# Altium PCB PCB2.pcbdoc
Units mil, origin at the board's own origin, x right, y up, seen from the top; angles counter-clockwise.
Board outline 3020 x 2095 mil, 2 copper layers (Top Layer, Bottom Layer); 19 components, 13 nets, 79 pads, 108 vias.
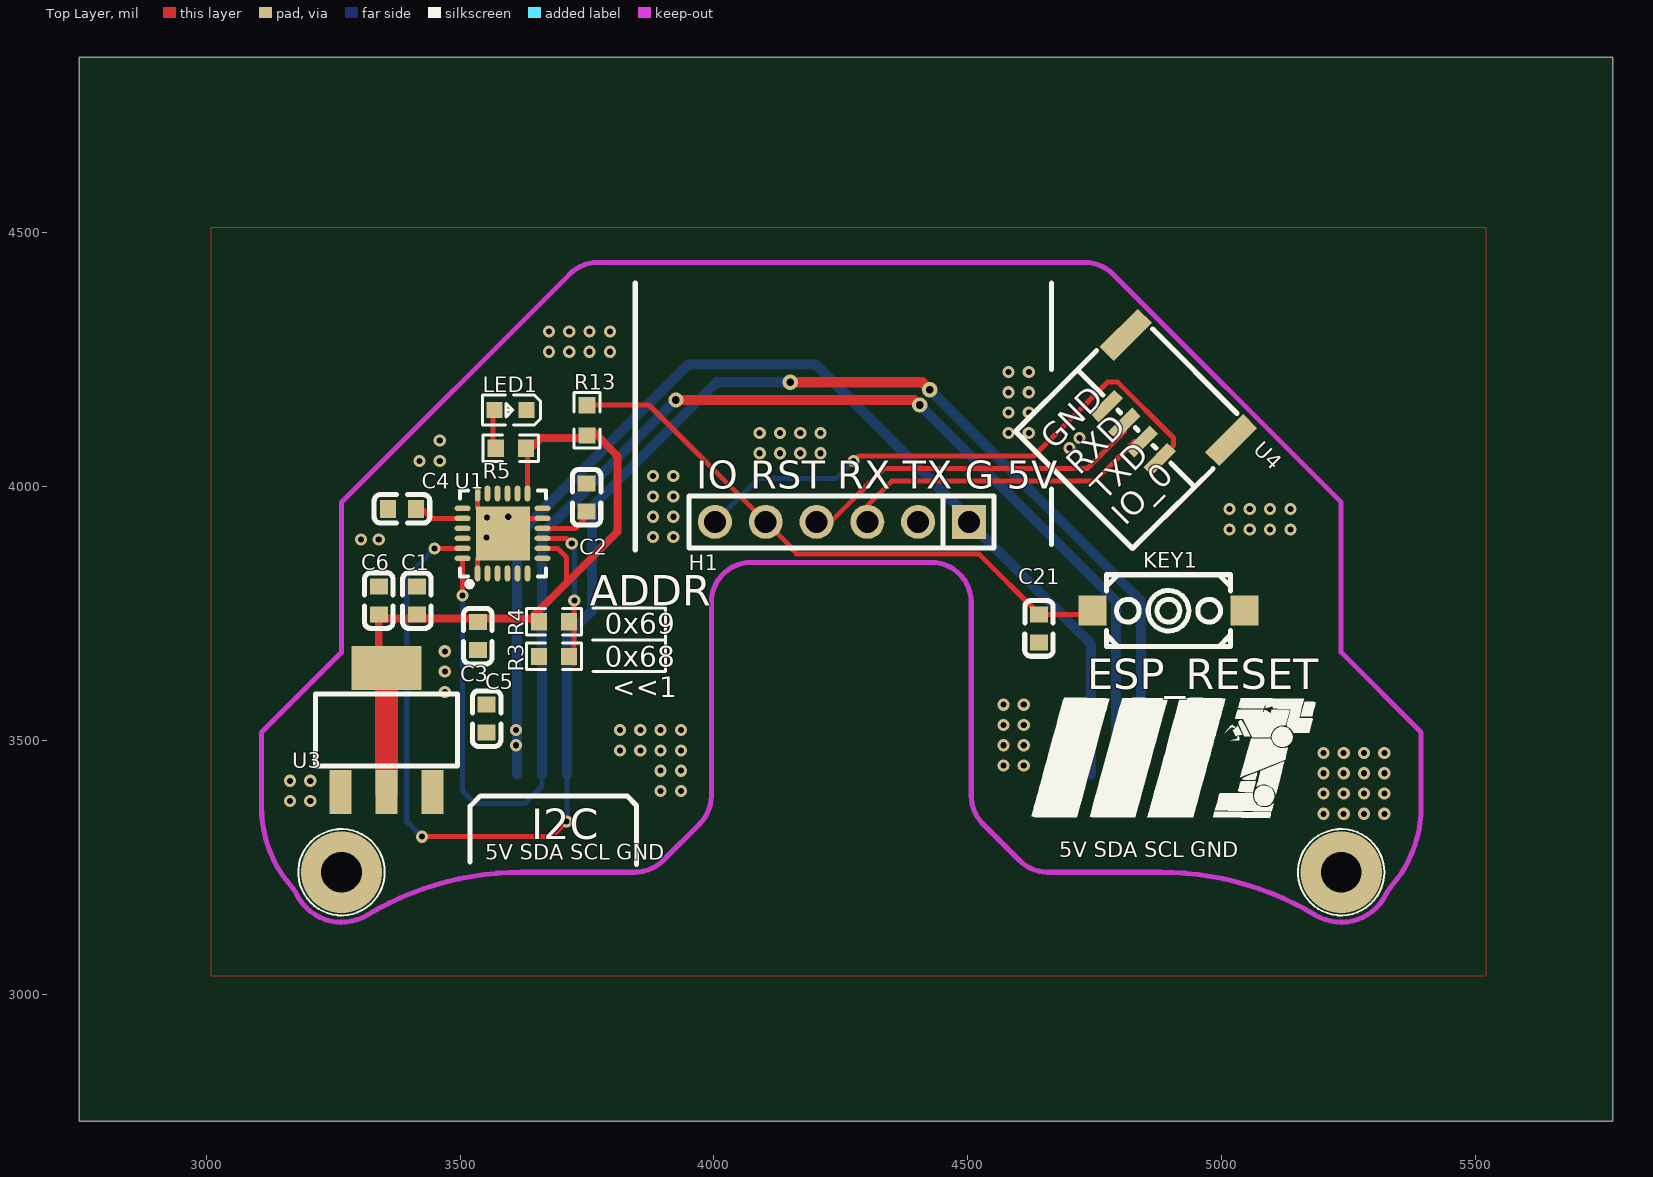
[diagram p0: Top Layer view]
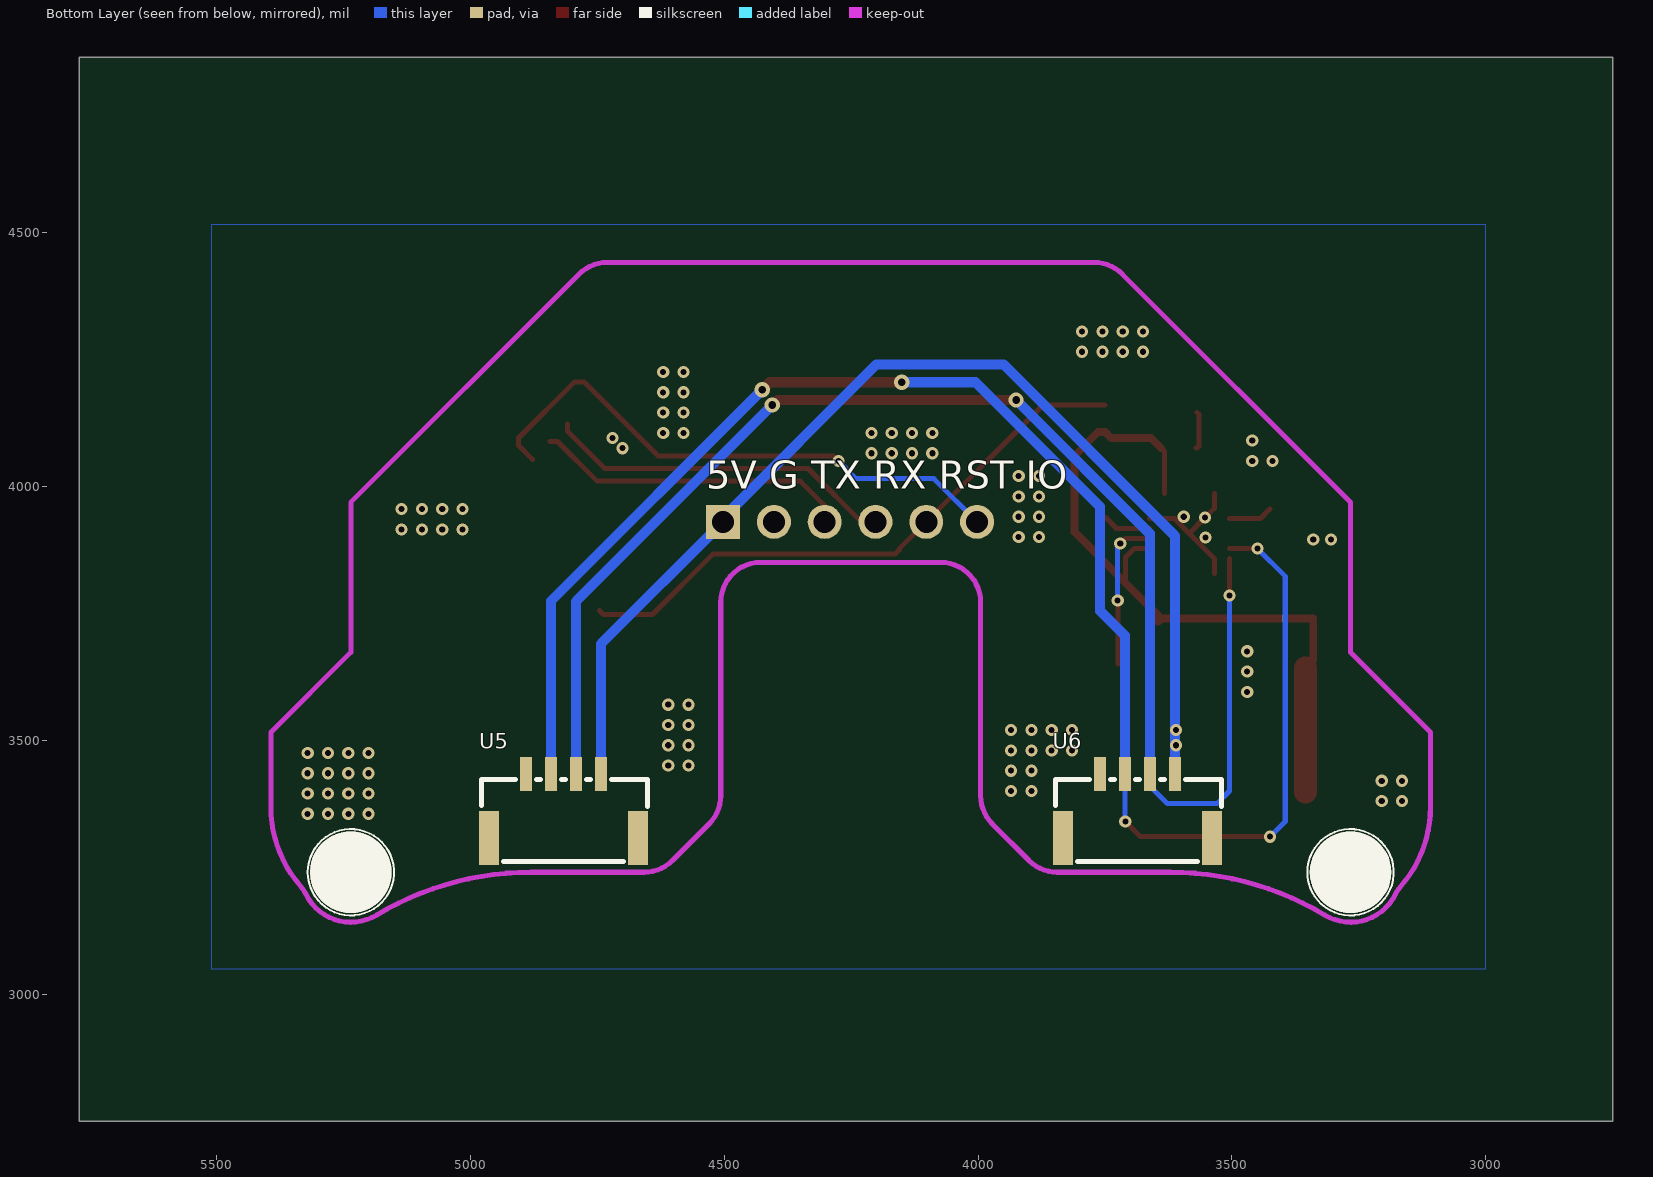
[diagram p1: Bottom Layer view, seen from below]

## Layer stack, top to bottom
Top Layer: signal copper (thickness not stored)
Dielectric: dielectric 12.6, FR-4, Dk 4.8
Bottom Layer: signal copper (thickness not stored)

## Board outline
5770,2750 2750,2750 2750,4845 5770,4845

## Design rules (kind name [scope] priority, off if disabled: settings)
BoardOutlineClearance copperThickness1oz [All] p0: genericclearance=10 ignorepadtopadclearanceinfootprint=FALSE except(0: Arc-SplitContinuation Track-SplitContinuation SMDPad-SplitContinuation THPad-SplitContinuation Via-SplitContinuation Fill-SplitContinuation Poly-SplitContinuation Region-SplitContinuation Text-SplitContinuation; 6: Track-CutoutEdge SMDPad-CutoutEdge THPad-CutoutEdge Via-CutoutEdge Region-CutoutEdge; 11.8: Track-OutlineEdge SMDPad-OutlineEdge THPad-OutlineEdge Via-OutlineEdge Fill-OutlineEdge Region-OutlineEdge Poly-OutlineEdge Text-OutlineEdge Fill-CutoutEdge)
BoardOutlineClearance copperThickness2oz [All] p0: genericclearance=10 ignorepadtopadclearanceinfootprint=FALSE except(0: Arc-SplitContinuation Track-SplitContinuation SMDPad-SplitContinuation THPad-SplitContinuation Via-SplitContinuation Fill-SplitContinuation Poly-SplitContinuation Region-SplitContinuation Text-SplitContinuation; 6: Track-CutoutEdge SMDPad-CutoutEdge THPad-CutoutEdge Via-CutoutEdge Region-CutoutEdge; 11.8: Track-OutlineEdge SMDPad-OutlineEdge THPad-OutlineEdge Via-OutlineEdge Fill-OutlineEdge Region-OutlineEdge Poly-OutlineEdge Text-OutlineEdge Fill-CutoutEdge)
Clearance copperThickness1oz [(InNet('GND') OR InNet('VCC-3.3V') OR InNet('$1N1296') OR InNet('$1N969') OR InNet('RST') OR InNet('SCL') OR InNet('SDA') OR InNet('VCC-5.0V') OR InNet('RXD') OR InNet('TXD') OR InNet('IO_0') OR InNet('$1N2648') OR InNet('AD0'))] p1: gap=7 ignorepadtopadclearanceinfootprint=FALSE except(4: Track-Track; 6: Track-SMDPad SMDPad-SMDPad Track-THPad SMDPad-THPad THPad-THPad Track-Via SMDPad-Via THPad-Via Via-Via SMDPad-Fill THPad-Fill Via-Fill Fill-Fill Track-Region SMDPad-Region THPad-Region Via-Region Region-Region Track-Poly SMDPad-Poly THPad-Poly Via-Poly Fill-Poly Region-Poly Poly-Poly Track-Text SMDPad-Text THPad-Text Via-Text Fill-Text Region-Text Poly-Text Text-Text; 6.9: Track-Hole SMDPad-Hole THPad-Hole Via-Hole Fill-Hole Region-Hole Poly-Hole Text-Hole Sheet-Hole; 11.8: Track-Fill Fill-Region Track-Sheet SMDPad-Sheet THPad-Sheet Via-Sheet Fill-Sheet Region-Sheet Poly-Sheet Text-Sheet)
Clearance copperThickness2oz [All] p1: gap=7 ignorepadtopadclearanceinfootprint=FALSE except(6: Track-SMDPad SMDPad-SMDPad Track-THPad SMDPad-THPad THPad-THPad Track-Via SMDPad-Via THPad-Via Via-Via SMDPad-Fill THPad-Fill Via-Fill Fill-Fill Track-Region SMDPad-Region THPad-Region Via-Region Region-Region Track-Poly SMDPad-Poly THPad-Poly Via-Poly Fill-Poly Region-Poly Poly-Poly Track-Text SMDPad-Text THPad-Text Via-Text Fill-Text Region-Text Poly-Text Text-Text; 6.9: Track-Hole SMDPad-Hole THPad-Hole Via-Hole Fill-Hole Region-Hole Poly-Hole Text-Hole Sheet-Hole; 8: Track-Track; 11.8: Track-Fill Fill-Region Track-Sheet SMDPad-Sheet THPad-Sheet Via-Sheet Fill-Sheet Region-Sheet Poly-Sheet Text-Sheet)
DiffPairsRouting differentialPair [All] p1: maxuncoupledlength=10 minlimit=6 maxlimit=6 mostfreqgap=6 toplayer_minwidth=5 toplayer_prefwidth=10 toplayer_maxwidth=100 bottomlayer_minwidth=5 bottomlayer_prefwidth=10 bottomlayer_maxwidth=100
PasteMaskExpansion pasteMaskExpansion [All] p1: expansion=0
PlaneConnect innerPlane [All] p1: planeconnectstyle=Relief reliefexpansion=20 reliefentries=4 reliefconductorwidth=10 reliefairgap=10
PolygonConnect copperRegion [All] p1: connectstyle=Direct reliefentries=4 reliefconductorwidth=10 polygonreliefangle="90 Angle" airgapwidth=10
RoutingVias viaSize [All] p1: viastyle="Through Hole" holewidth=12 minholewidth=11.8 maxholewidth=248 width=24 minwidth=19.7 maxwidth=393.7
SolderMaskExpansion solderMaskExpansion [All] p1: useseparateexpansions=TRUE expansion=2 expansionbottom=2
Width copperThickness1oz [All] p1: maxlimit=100 minlimit=5 preferedwidth=10
Width copperThickness2oz [All] p1: maxlimit=100 minlimit=8 preferedwidth=10

## Components (designator, comment, footprint, x,y, rotation, side; value= is the part's Value field where it differs from the comment)
C1 "CGA0603X7R104K500JT" C0603 3415,3775 r90 top
C2 "CGA0603X7R104K500JT" C0603 3749.21,3978.22 r90 top
C3 "CC0603KRX7R9BB103" C0603 3535,3705 r90 top
C4 "CC0603KRX7R9BB222" C0603 3385.63,3955.63 r180 top
C5 "CGA0603X5R106K100JT" C0603 3552.44,3542.56 r270 top
C6 "CGA0603X5R106K100JT" C0603 3340,3775 r270 top
C21 "CGA0603X5R106K100JT" C0603 4640,3720 r270 top
H1 "PZ254V-11-06P" HDR-TH_6P-P2.54-V-M 4251.97,3930 r180 top
KEY1 "K2-3.6×6.1_SMD" KEY-SMD_2P-L6.2-W3.6-LS8.0 4895,3755 r0 top
LED1 "KT-0603R" LED0603-RD 3599.45,4150.32 r180 top
R3 "0603WAF1002T5E" R0603 3685,3665 r0 top
R4 "0603WAF1002T5E" R0603 3685,3733 r180 top
R5 "0603WAF1001T5E" R0603 3600,4075 r180 top
R13 "0603WAF1002T5E" R0603 3750,4130 r270 top
U1 "MPU-6050" QFN-24_L4.0-W4.0-P0.50-BL-EP2.7 3583.64,3907.21 r0 top
U3 "AMS1117-3.3" SOT-223_L6.7-W3.5-P2.30-BR 3355,3520 r270 top
U4 "GH1.25-4P_C9900006327" CONN-SMD_GH1.25-4P 4870,4150 r135 top
U5 "GH1.25-4P_C9900006327" CONN-SMD_GH1.25-4P 4816.17,3370 r180 bottom
U6 "GH1.25-4P_C9900006327" CONN-SMD_GH1.25-4P 3686.17,3370 r180 bottom

## Footprints (in the part's own frame and the unit in brackets; to place one, negate y for a bottom-side part, rotate by r counter-clockwise, add the part's x,y. Pads: shape width x height; smd on the part's side, far side on the other; paste and mask are expansions set on the pad)
C0603 [mm]
  rect 0.8x0.9 smd: 1(-0.7,0) 2(0.7,0)
  silkscreen extent -1.39,-0.71 1.39,0.71
CONN-SMD_GH1.25-4P [mm]
  rect 0.6x1.7 smd: 1(-1.875,1.6) 2(-0.625,1.6) 3(0.625,1.6) 4(1.875,1.6)
  rect 1x2.7 smd: 5(-3.725,-1.6) 6(3.725,-1.6)
  silkscreen extent -4.1,-2.76 4.2,1.34
HDR-TH_6P-P2.54-V-M [mm]
  rect 1.7x1.7 hole 1.1: 1(-6.35,0)
  round 1.7 hole 1.1: 2(-3.81,0) 3(-1.27,0) 4(1.27,0) 5(3.81,0) 6(6.35,0)
  silkscreen extent -7.6,-1.3 7.65,1.3
KEY-SMD_2P-L6.2-W3.6-LS8.0 [mm]
  rect 1.4x1.5 smd: 1(-3.8,0) 2(3.8,0)
  silkscreen extent -3.1,-1.8 3.1,1.8
LED0603-RD [mm]
  rect 0.8x0.8 smd: 1(-0.799,0) 2(0.799,0)
  silkscreen extent -1.49,-0.75 1.39,0.76
QFN-24_L4.0-W4.0-P0.50-BL-EP2.7 [mm]
  oval 0.28x0.8 smd: 1(-1.25,-2) 2(-0.75,-2) 3(-0.25,-2) 4(0.25,-2) 5(0.75,-2) 6(1.25,-2) 13(1.25,2) 14(0.75,2) 15(0.25,2) 16(-0.25,2) 17(-0.75,2) 18(-1.242,2)
  oval 0.8x0.28 smd: 7(2,-1.25) 8(2,-0.75) 9(2,-0.25) 10(2,0.25) 11(2,0.75) 12(2,1.25) 19(-2,1.25) 20(-2,0.75) 21(-2,0.25) 22(-2,-0.25) 23(-2,-0.75) 24(-2,-1.25)
  rect 2.7x2.7 smd: 25(0.012,0)
  silkscreen extent -2.14,-2.79 2.16,2.15
R0603 [mil]
  rect 31.75x34.02 smd: 1(-29.66,0) 2(29.66,0)
  silkscreen extent -55,-26 55,26
SOT-223_L6.7-W3.5-P2.30-BR [mm]
  rect 2.2x1.1 smd: 1(3.099,-2.3) 2(3.099,0) 3(3.099,2.3)
  rect 2.2x3.5 smd: 4(-3.099,0)
  silkscreen extent -1.8,-3.55 1.8,3.55

## Via types
v1: diameter 24.02, hole 12.01, Top Layer to Bottom Layer, 102 vias
v2: diameter 30, hole 15, Top Layer to Bottom Layer, 4 vias
v3: diameter 160, hole 80, Top Layer to Bottom Layer, 2 vias

## Nets (pads, with @x,y where several pads share a name; then routed paths per layer and width w, separated by ;. In a path a pad name is that pad's centre, name@x,y a point inside that pad or via, vN(x,y) a via of type N, cw(c..) or ccw(c..) an arc to the next point about the centre after c; other vN are vias at no path point)
$1N969: C4.1 U1.20 | length 87.7
  Top Layer w10: C4.1@3425,3955.63 3443.89,3936.74 U1.20
$1N1296: C2.1 U1.10 | length 95.9
  Top Layer w10: U1.10 3727.41,3917.05 C2.1@3749.21,3938.85
$1N2648: LED1.2 R5.2 | length 74.2
  Top Layer w10: LED1.2@3568.53,4144.99 3565,4141.47 3565,4079.37 3569.37,4075 R5.2
AD0: R3.2 R4.1 U1.9 | length 301.5
  Top Layer w10: U1.9 3710,3897.37 v1(3720,3887.37) ; R3.2@3724.37,3650 3724.37,3774.37 v1(3725,3775)
  Bottom Layer w10: v1(3720,3887.37) 3725,3882.37 v1(3725,3775)
GND: C1.2 C2.2 C3.1 C4.2 C5.1 C6.1 C21.2 H1.2 KEY1.2 LED1.1 R3.1 U1.1 U1.11 U1.18 U1.25 U3.1 U4.4 U5.1 U6.1 | length 289
  Top Layer w10: U1.1 3534.43,3857.51 U1.25 ; U1.18 3534.74,3956.6 v1(3553.03,3938.31) U1.25 ; U1.11 3613.66,3936.74 U1.25
  other v1: 5200,3355 5240,3355 5280,3355 5320,3355 3165,3380 3205,3380 5200,3395 5240,3395 5280,3395 5320,3395 3895,3400 3935,3400 3165,3420 3205,3420 5200,3435 5240,3435 5280,3435 5320,3435 3895,3440 3935,3440 4570,3450 4610,3450 5200,3475 5240,3475 5280,3475 5320,3475 3815,3480 3855,3480 3895,3480 3935,3480 4570,3490 4610,3490 3815,3520 3855,3520 3895,3520 3935,3520 4570,3530 4610,3530 4570,3570 4610,3570 3470,3595 3470,3635 3470,3675 3305,3895 3340,3895 3552.18,3899.45 3880,3900 3920,3900 5015,3915 5055,3915 5095,3915 5135,3915 3595,3940 3880,3940 3920,3940 5015,3955 5055,3955 5095,3955 5135,3955 3880,3980 3920,3980 3880,4020 3920,4020 3420,4050 3460,4050 4090,4065 4130,4065 4170,4065 4210,4065 4700,4075 3460,4090 4720,4095 4090,4105 4130,4105 4170,4105 4210,4105 4580,4105 4620,4105 4580,4145 4620,4145 4580,4185 4620,4185 4580,4225 4620,4225 3675,4265 3715,4265 3755,4265 3795,4265 3675,4305 3715,4305 3755,4305 3795,4305
  other v3: 3266.5,3240 5235,3240
IO_0: H1.6 U4.1 | length 1115.6
  Top Layer w10: v1(4275,4050) 4285,4060 4630,4060 4775,4205 4795,4205 4905,4095 4905,4080.6 U4.1
  Bottom Layer w10: H1.6 4086.97,4015 4240,4015 v1(4275,4050)
RST: C21.1 H1.5 KEY1.1 R13.1 | length 1170.7
  Top Layer w10: R13.1 3750.34,4160 3871.97,4160 H1.5 4155,3876.97 4155,3875 4162.97,3867.03 4521.26,3867.03 4640.87,3747.42 4737.82,3747.42 KEY1.1
RXD: H1.4 U4.3 | length 698.9
  Top Layer w10: H1.4 4206.97,3925 4225,3925 4335,4035 4735.2,4035 4808.06,4107.86 U4.3
SCL: U1.23 U5.2 U6.2 | length 3297.8
  Top Layer w10: v1(3425,3310) 3680,3310 v1(3710,3340) ; v1(3450,3877.68) U1.23
  Top Layer w20: v2(4150,4205) 4410,4205 v2(4425,4190)
  Bottom Layer w10: v1(3425,3310) 3395,3340 3395,3822.68 v1(3450,3877.68) ; v1(3710,3340) 3710.77,3340.77 U6.2
  Bottom Layer w20: U6.2 3710.77,3705.77 3760,3755 3760,3960 4005,4205 v2(4150,4205) ; v2(4425,4190) 4840.77,3774.23 U5.2
SDA: U1.24 U5.3 U6.3 | length 2880.1
  Top Layer w10: v1(3504.9,3785) U1.24
  Top Layer w20: v2(3925,4170) 4395,4170 v2(4405,4160)
  Bottom Layer w10: v1(3504.9,3785) 3504.9,3400.1 3530,3375 3627.07,3375 3661.56,3409.49 U6.3
  Bottom Layer w20: U6.3 3661.56,3906.56 v2(3925,4170) ; v2(4405,4160) 4791.56,3773.44 U5.3
TXD: H1.3 U4.2 | length 637.5
  Top Layer w10: H1.3 4286.97,3945 4286.97,3946.97 4350,4010 4750,4010 4828.07,4088.07 U4.2
VCC-3.3V: C1.1 C3.2 C6.2 R4.2 R5.1 R13.2 U1.8 U1.13 U3.2 U3.4 | length 1452.1
  Top Layer w10: U1.13 3632.85,4068.48 R5.1@3639.37,4075 ; U1.8 3692.32,3877.68 3710,3860 3710,3810
  Top Layer w15: U3.4 3339.61,3657.39 3339.61,3739.75 3638.88,3739.75 3645.63,3733 3645.63,3745.63 3710,3810 3810,3910 3810,4060 3763.04,4106.96 3750,4106.96 3738.04,4095 3659.37,4095 R5.1@3639.37,4075
  Top Layer w45: U3.2 U3.4
VCC-5.0V: C5.2 H1.1 U3.3 U5.4 U6.4 | length 2228.5
  Bottom Layer w20: U6.4 3612.35,3902.35 3950,4240 4200,4240 4501.97,3938.03 H1.1 4742.35,3689.62 U5.4
  other v1: 3610,3490 3610,3520
pads on no net: U1.2 U1.3 U1.4 U1.5 U1.6 U1.7 U1.12 U1.14 U1.15 U1.16 U1.17 U1.19 U1.21 U1.22 U4.5 U4.6 U5.5 U5.6 U6.5 U6.6

## Polygon pours and split planes (outlines as drawn)
VCC-5.0V on Bottom Layer (solid, remove dead copper, pour order 10): 3595,3535 3625,3535 3625,3475 3595,3475
VCC-5.0V on Bottom Layer (solid, remove dead copper, pour order 12): 3595,3535 3625,3535 3625,3400 3595,3400
GND on Bottom Layer (solid, remove dead copper, pour order 14): 3085,4595 5435,4595 5435,3000 3085,3000
GND on Top Layer (solid, remove dead copper, pour order 6): 3010,4505 5520,4505 5520,3040 3010,3040
GND on Bottom Layer (solid, remove dead copper, pour order 16): 3000,4515 5510,4515 5510,3050 3000,3050
no net on Top Layer (solid, remove dead copper, pour order 8): 3010,4510 5520,4510 5520,3035 3010,3035
VCC-3.3V on Top Layer (solid, remove dead copper, pour order 0): 3310,3600 3353.59,3556.41 3355,3556.41 3405,3606.41 3405,3610 3320,3610
VCC-3.3V on Top Layer (solid, remove dead copper, pour order 2): 3710,3866.72 3710,3810 3766.72,3866.72
VCC-5.0V on Top Layer (solid, remove dead copper, pour order 4): 3615,3535 3630,3520 3630,3480 3620,3470 3598.21,3470 3576.8,3491.41 3496.41,3491.41 3465,3460 3465,3435.73 3426.88,3435.73 3426.88,3471.88 3490,3535

## Keep-outs
Board Outline Layer:
  lines w10: 3109.02,3368.19 3109.02,3515.59 3266.5,3673.07 3266.5,3968.34 3715.88,4417.72 cw(c3771.56,4362.04) 3771.56,4440.78 4729.95,4440.78 cw(c4729.95,4362.04) 4785.62,4417.72 5235,3968.34 5235,3673.07 5392.48,3515.59 5392.48,3368.19 cw(c5156.26,3368.19) 5334.35,3213 ccw(c5393.71,3161.27) 5323.17,3196.26 cw(c5235,3240) 5184.3,3155.64 ccw(c4880.12,2649.45) 4880.12,3240 4657.38,3240 cw(c4657.38,3318.74) 4601.7,3263.06 4529.72,3335.05 cw(c4585.4,3390.72) 4506.66,3390.72 4506.66,3771.49 ccw(c4427.92,3771.49) 4427.92,3850.23 4073.59,3850.23 ccw(c4073.59,3771.49) 3994.85,3771.49 3994.85,3390.72 cw(c3916.11,3390.72) 3971.78,3335.05 3899.8,3263.06 cw(c3844.12,3318.74) 3844.12,3240 3621.38,3240 ccw(c3621.38,2649.45) 3317.2,3155.64 cw(c3266.5,3240) 3178.33,3196.26 ccw(c3107.79,3161.27) 3167.15,3213 cw(c3345.24,3368.19) 3109.02,3368.19

## Silkscreen, mask and mechanical layers (free items; w line width, h text height)
Top Silkscreen Layer:
  drawing of 35 lines, arcs and shapes, not listed
  text "GND" at 4670,4070 h45 r45
  text "RXD" at 4720,4020 h45 r45
  text "IO RST RX TX G 5V" at 3965,3995 h55
  text "TXD" at 4770,3970 h45 r45
  text "IO_0" at 4810,3920 h45 r45
  text "ADDR" at 3755,3765 h60
  text "0x69" at 3785,3710 h40
  text "0x68" at 3785,3645 h40
  text "ESP_RESET" at 4735,3600 h60
  text "<<1" at 3800,3585 h40
  text "I2C" at 3640,3305 h60
  text "5V SDA SCL GND" at 4680,3270 h30
  text "5V SDA SCL GND" at 3550,3265 h30
Bottom Silkscreen Layer:
  circle w4: c5235,3240 r85
  circle w4: c3266.5,3240 r85
  region: 5315,3240 cw(c5235,3240) 5155,3240 cw(c5235,3240)
  region: 3346.5,3240 cw(c3266.5,3240) 3186.5,3240 cw(c3266.5,3240)
  text "5V G TX RX RST IO" at 4535,3995 h55
Top Solder Mask Layer:
  region: 5315,3240 cw(c5235,3240) 5155,3240 cw(c5235,3240)
  region: 3346.5,3240 cw(c3266.5,3240) 3186.5,3240 cw(c3266.5,3240)